# Altium PCB SCP_Controller.PcbDoc (part 1 of 2)
Units mm, origin at the board's own origin, x right, y up, seen from the top; angles counter-clockwise.
Board outline 53.34 x 68.58 mm, 2 copper layers (Top Layer, Bottom Layer); 54 components, 29 nets, 159 pads, 26 vias.
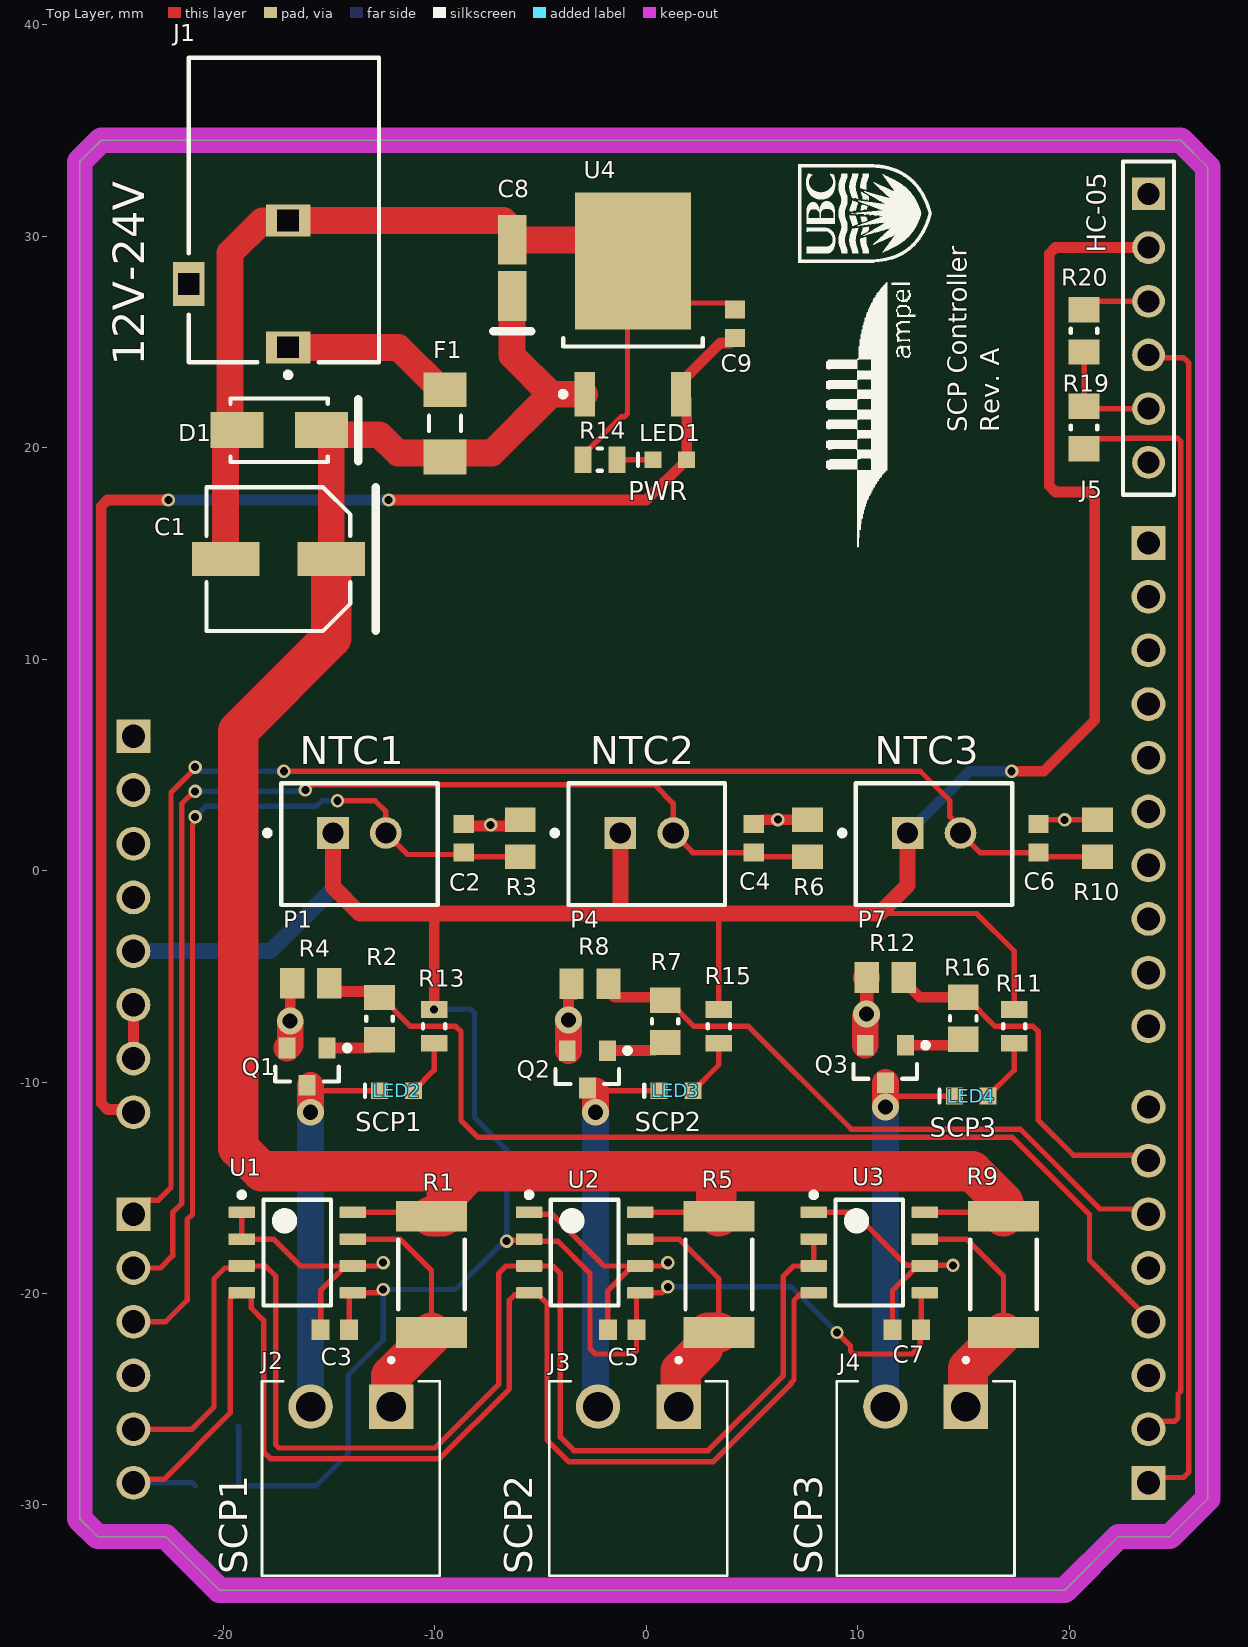
[diagram p0: Top Layer view]
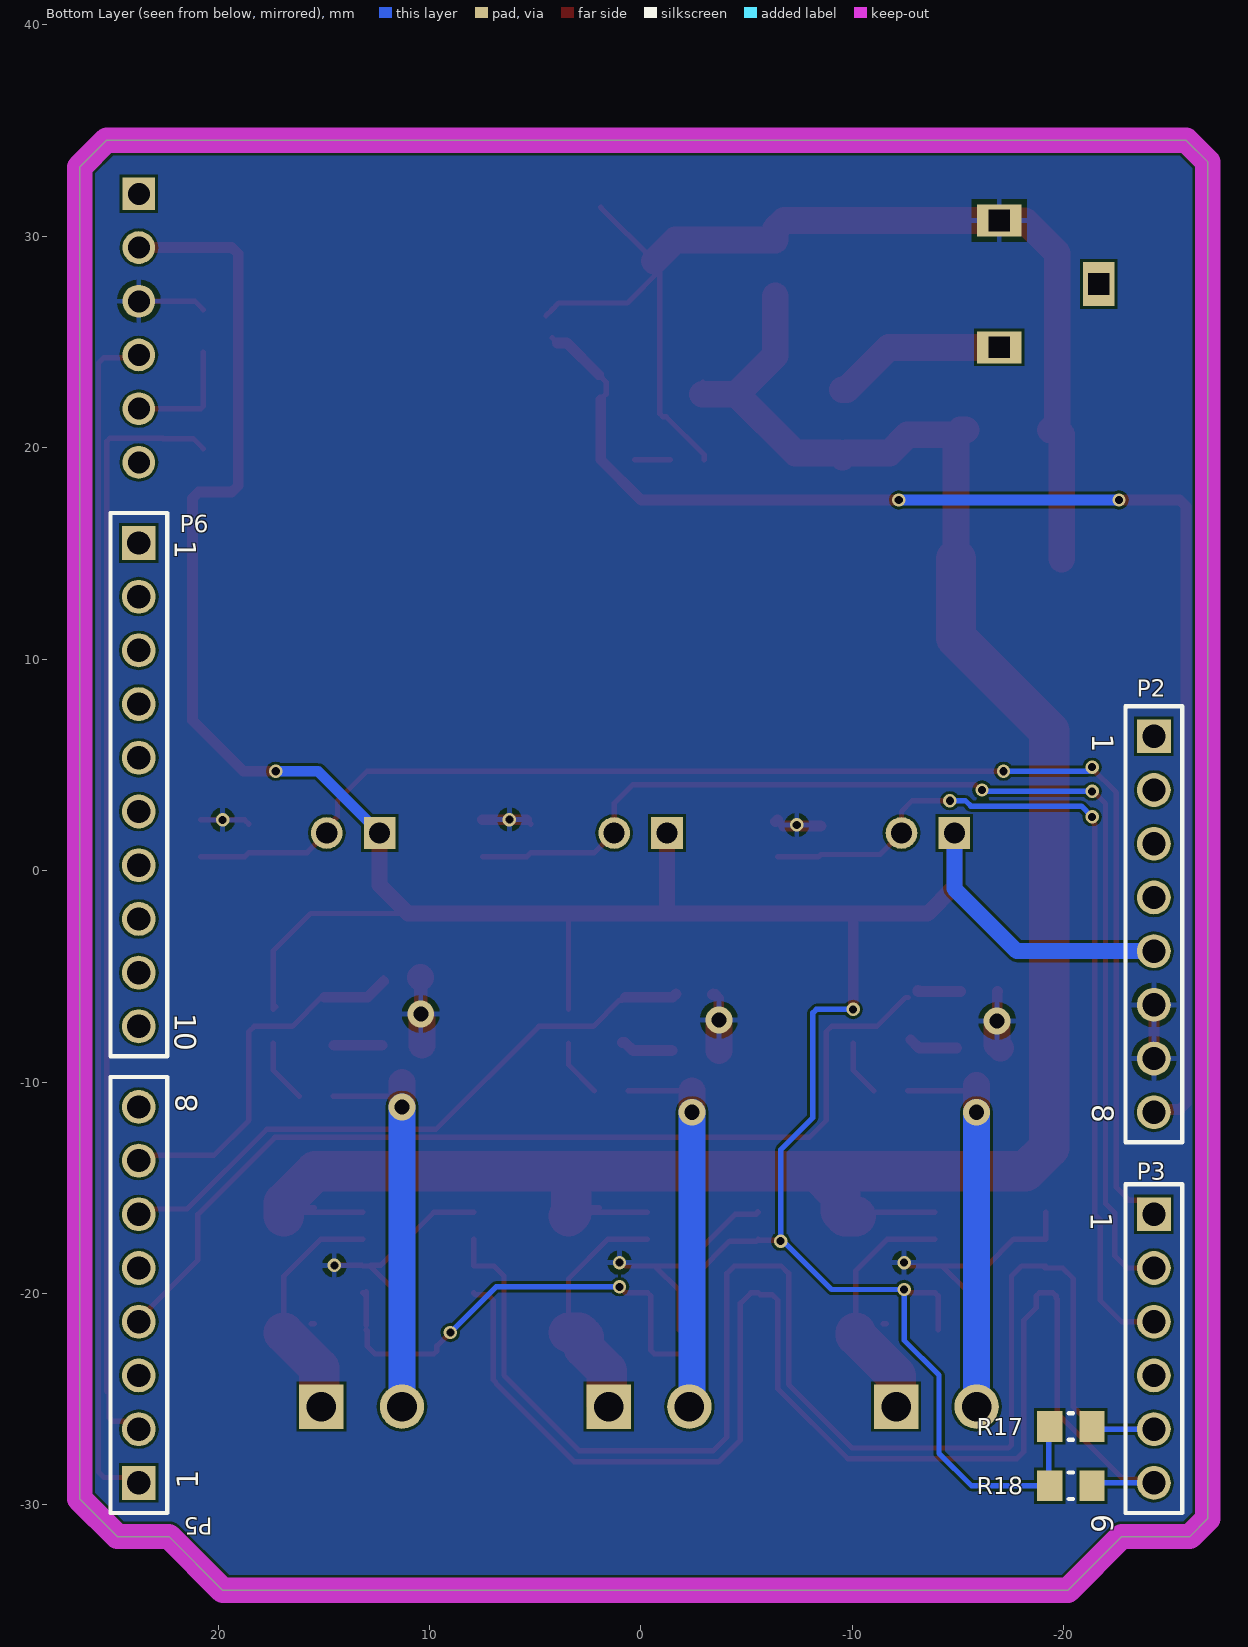
[diagram p1: Bottom Layer view, seen from below]
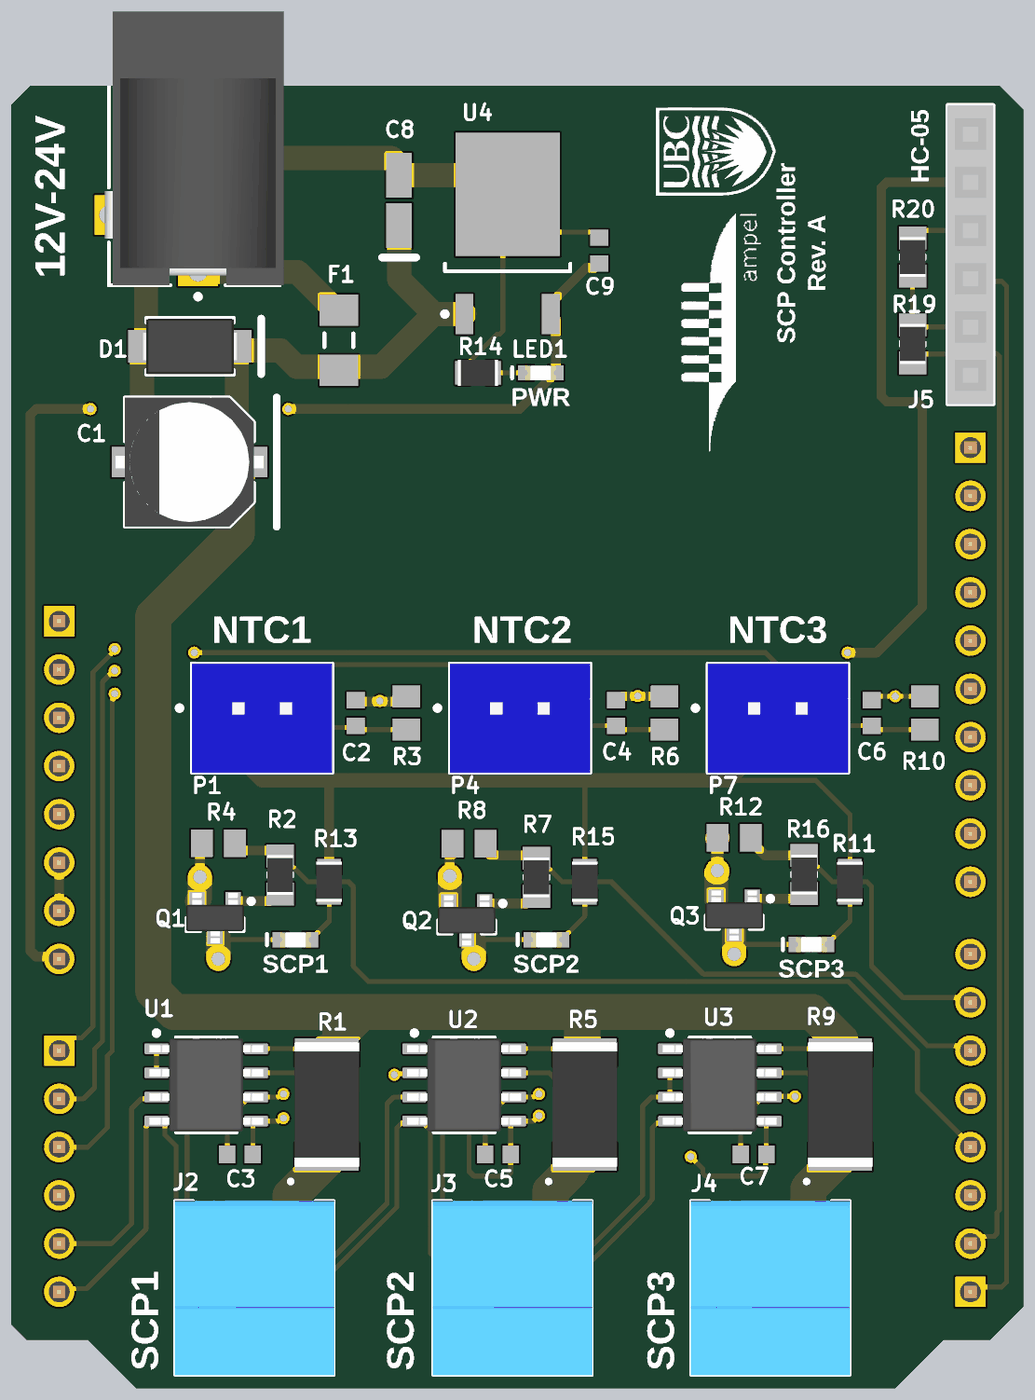
[diagram p2: 3D render of the assembled board from above, using the file's embedded part models]
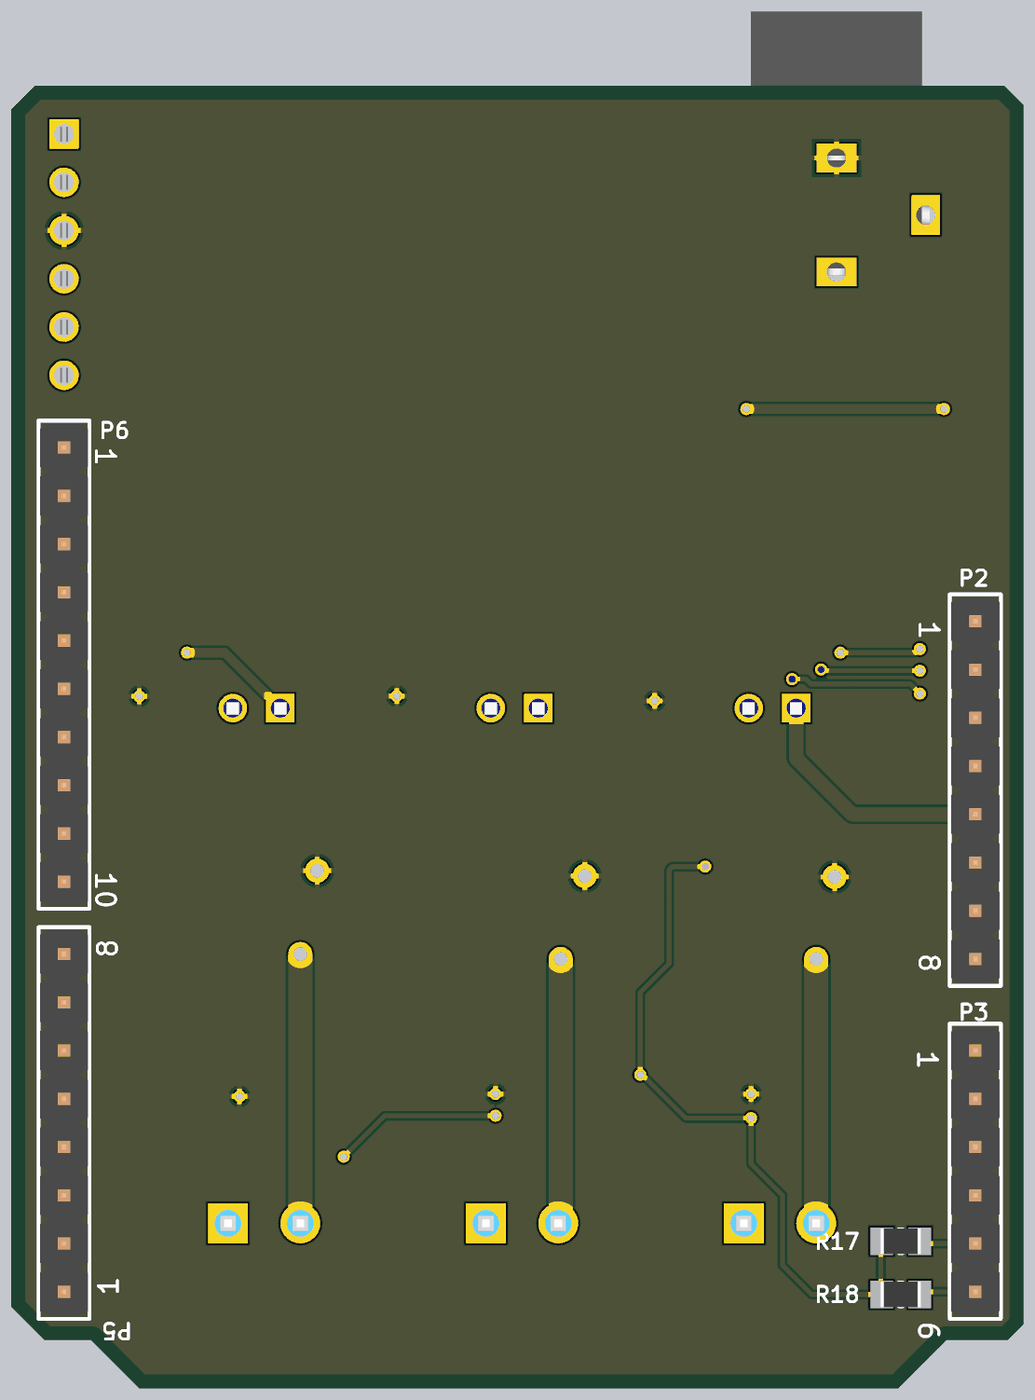
[diagram p3: 3D render of the assembled board from below, using the file's embedded part models]

## Layer stack, top to bottom
Top Solder: solder mask 0.0102, Solder Resist, Dk 3.5
Top Layer: signal copper 0.0356
Dielectric 1: dielectric 0.32, FR-4, Dk 4.8
Bottom Layer: signal copper 0.0356
Bottom Solder: solder mask 0.0102, Solder Resist, Dk 3.5

## Board outline
-26.797,33.528 -26.797,-30.658 -25.959,-31.496 -22.733,-31.496 -20.193,-34.036 19.787,-34.036 22.327,-31.496 24.765,-31.496 26.543,-29.718 26.543,33.274 25.273,34.544 -25.781,34.544

## Design rules (kind name [scope] priority, off if disabled: settings)
Clearance [All] p1: gap=0.127 ignorepadtopadclearanceinfootprint=FALSE
HoleSize [All] p1: absolutevalues=TRUE maxlimit=6.3 minlimit=0.2 maxpercent=80.000 minpercent=20.000
MinimumAnnularRing [All] p1: minimumring=0.076
MinimumSolderMaskSliver [All] p1: minsoldermaskwidth=0.127
PolygonConnect [All] p1: connectstyle=Relief reliefconductorwidth=0.254 reliefentries=4 polygonreliefangle="90 Angle" airgapwidth=0.254
RoutingVias [All] p1: holewidth=0.381 width=0.635 viastyle="Through Hole" minholewidth=0.3 minwidth=0.6 maxholewidth=0.711 maxwidth=1.27
SilkToSilkClearance [All] p1: silktosilkclearance=0.2
SolderMaskExpansion [All] p1: expansion=0.102 istentingtop=FALSE
Width [All] p1: maxlimit=2.54 minlimit=0.127 preferedwidth=0.254 minimp=50.000000 maximp=50.000000 favimp=50.000000
27 further rules are at their usual default settings.

## Components (designator, comment, footprint, x,y, rotation, side; value= is the part's Value field where it differs from the comment)
C1 "47uF 35V" PNSC-FP-V-D_V -17.399,14.732 r180 top
C2 "0.1uF" CAPC1608X90X35NL10T15 -8.636,1.524 r90 top
C3 "0.1uF" CAPC1608X90X35NL10T15 -14.732,-21.717 r180 top
C4 "0.1uF" CAPC1608X90X35NL10T15 5.08,1.524 r90 top
C5 "0.1uF" CAPC1608X90X35NL10T15 -1.143,-21.717 r180 top
C6 "0.1uF" CAPC1608X90X35NL10T15 18.542,1.524 r90 top
C7 "0.1uF" CAPC1608X90X35NL10T15 12.319,-21.717 r180 top
C8 "0.33uF 35V" KEMT-A-3216-18-2_M -6.35,28.503 r90 top
C9 "0.1uF" CAPC1608X90X35NL10T15 4.191,25.868 r90 top
D1 "B360A" DIOD-B360A_V -17.367,20.828 r0 top
F1 "6A" LFUS-0468001.NR_V -9.525,21.148 r270 top
J1 "24V 5A Max" CUI-PJ-102A_V -17.145,31.242 r0 top
J2 "SCP_1" *CUI_TBP02R1-381-02BE -12.065,-25.349 r180 top
J3 "SCP_1" *CUI_TBP02R1-381-02BE 1.524,-25.349 r180 top
J4 "SCP_1" *CUI_TBP02R1-381-02BE 15.113,-25.349 r180 top
J5 "HC-05" SMTC-SSW-106-02-X-S 23.749,32.004 r270 top
LED1 "GREEN" 0603_A 1.105,19.431 r0 top
LED2 "RED" 0603_A -11.811,-10.414 r0 top
LED3 "RED" 0603_A 1.397,-10.414 r0 top
LED4 "RED" 0603_A 15.367,-10.668 r0 top
P1 "NTC_1" JST-B2B-XH-A_V -13.57,1.778 r0 top
P2 "POWER" 61300811121 -24.257,-2.54 r270 bottom
P3 "ANALOG" 61300611121 -24.257,-22.606 r270 bottom
P4 "NTC_1" JST-B2B-XH-A_V 0.019,1.778 r0 top
P5 "DIGITAL_1" 61300811121 23.749,-20.066 r90 bottom
P6 "DIGITAL_2" 61301011121 23.749,4.064 r270 bottom
P7 "NTC_1" JST-B2B-XH-A_V 13.608,1.778 r0 top
Q1 "IRLML6244TRPBF" INTR-SOT23-3_V -16.047,-9.275 r270 top
Q2 "IRLML6244TRPBF" INTR-SOT23-3_V -2.791,-9.398 r270 top
Q3 "IRLML6244TRPBF" INTR-SOT23-3_V 11.303,-9.144 r270 top
R1 "0.1R" RESC6432X89X76LL25T25 -10.16,-19.094 r90 top
R2 "100R" RESC2013X60X35ML10T20 -12.621,-7.005 r270 top
R3 "18k 0.5%" RESC2013X70X40NL20T20 -5.969,1.524 r270 top
R4 "1M" RESC2013X70X40NL20T20 -15.875,-5.334 r0 top
R5 "0.1R" RESC6432X89X76LL25T25 3.429,-19.094 r90 top
R6 "18k 0.5%" RESC2013X70X40NL20T20 7.62,1.524 r270 top
R7 "100R" RESC2013X60X35ML10T20 0.889,-7.128 r270 top
R8 "1M" RESC2013X70X40NL20T20 -2.667,-5.359 r0 top
R9 "0.1R" RESC6432X89X76LL25T25 16.891,-19.094 r90 top
R10 "18k 0.5%" RESC2013X70X40NL20T20 21.336,1.524 r270 top
R11 "100R" RESC2013X60X35ML10T20 14.983,-6.985 r270 top
R12 "1M" RESC2013X70X40NL20T20 11.303,-5.055 r0 top
R13 "300R" RESC2013X60X35LL10T20 -10.033,-7.366 r270 top
R14 "270R" RESC2013X60X35LL10T20 -2.197,19.431 r0 top
R15 "300R" RESC2013X60X35LL10T20 3.429,-7.366 r270 top
R16 "300R" RESC2013X60X35LL10T20 17.399,-7.366 r270 top
R17 "3.3k" RESC2013X60X35ML10T20 -20.328,-26.289 r0 bottom
R18 "3.3k" RESC2013X60X35ML10T20 -20.328,-29.093 r0 bottom
R19 "1k" RESC2013X60X35ML10T20 20.701,20.955 r90 top
R20 "2k" RESC2013X60X35ML10T20 20.701,25.527 r270 top
U1 "INA219AIDR" D0008A_L -16.51,-18.062 r0 top
U2 "INA219AIDR" D0008A_L -2.921,-18.062 r0 top
U3 "INA219AIDR" D0008A_L 10.541,-18.062 r0 top
U4 "9V 0.5A" TO-252_N -0.635,26.779 r90 top

## Footprints (in the part's own frame and the unit in brackets; to place one, negate y for a bottom-side part, rotate by r counter-clockwise, add the part's x,y. Pads: shape width x height; smd on the part's side, far side on the other; paste and mask are expansions set on the pad)
0603_A [mm] "Chip LED, 2-Leads, Body 1.6x0.8mm, IPC Medium Density"
  rect 0.8x0.8 smd: 1(-0.8,0) 2(0.8,0)
  silkscreen extent -1.5,-0.3 -1.5,0.3, body extent -0.8,-0.4 0.8,0.4, height 0.7
61300611121 [mm] "Pin Header, pitch 2.54 mm, THT, Vertical, single row, 6p"
  rect 1.6x1.6 hole 1.1: 1(-6.35,0)
  round 1.6 hole 1.1: 2(-3.81,0) 3(-1.27,0) 4(1.27,0) 5(3.81,0) 6(6.35,0)
  silkscreen extent -7.77,-1.35 7.77,1.35, body extent -7.62,-1.27 7.62,1.27, height 8.57
61300811121 [mm] "Pin Header, pitch 2.54 mm, THT, Vertical, single row, 8p"
  rect 1.6x1.6 hole 1.1: 1(-8.89,0)
  round 1.6 hole 1.1: 2(-6.35,0) 3(-3.81,0) 4(-1.27,0) 5(1.27,0) 6(3.81,0) 7(6.35,0) 8(8.89,0)
  silkscreen extent -10.31,-1.35 10.31,1.35, body extent -10.16,-1.27 10.16,1.27, height 8.57
61301011121 [mm] "Pin Header, pitch 2.54 mm, THT, Vertical, single row, 10p"
  rect 1.6x1.6 hole 1.1: 1(-11.43,0)
  round 1.6 hole 1.1: 2(-8.89,0) 3(-6.35,0) 4(-3.81,0) 5(-1.27,0) 6(1.27,0) 7(3.81,0) 8(6.35,0) 9(8.89,0) 10(11.43,0)
  silkscreen extent -12.85,-1.35 12.85,1.35, body extent -12.7,-1.27 12.7,1.27, height 8.57
*CUI_TBP02R1-381-02BE [mm]
  rect 2.1x2.1 hole 1.4: 1(0,0)
  round 2.1 hole 1.4: 2(3.81,0)
  silkscreen extent -2.3,-2.3 6.11,8, body extent -2.3,-1.2 6.11,8, height 7.2
CAPC1608X90X35NL10T15 [mm] "Chip Capacitor, 2-Leads, Body 1.60x0.80mm, IPC Medium Density"
  rect 0.85x0.95 smd: 1(-0.675,0) 2(0.675,0)
  body extent -0.85,-0.45 0.85,0.45, height 0.9
CUI-PJ-102A_V [mm] "THD, 3-Leads, Body 14.4x9mm, Pitch 3mm"
  rect 2.1x1.5 hole 1 square: 1(0.2,-6.5) 2(0.2,-0.5)
  rect 1.5x2.1 hole 1 square: 3(-4.5,-3.5)
  silkscreen extent -4.5,-7.92 4.5,7.2, body extent -4.7,-7.2 4.7,7.2, height 11.5
D0008A_L [mm] "SOIC, 8-Leads, Body 5x4mm, Pitch 1.27mm, IPC High Density"
  rrect18% 1.25x0.55 smd: 1(-2.625,1.905) 2(-2.625,0.635) 3(-2.625,-0.635) 4(-2.625,-1.905) 5(2.625,-1.905) 6(2.625,-0.635) 7(2.625,0.635) 8(2.625,1.905)
  silkscreen extent -2.75,-2.5 1.6,2.85, body extent -3,-2.45 3,2.45, height 1.63
DIOD-B360A_V [mm] "Molded Diode, 2-Leads, Body 4.60x2.92mm"
  rect 2.5x1.7 smd: 1(-2,0) 2(2,0)
  silkscreen extent -2.3,-1.5 3.75,1.5, body extent -2.52,-1.46 2.52,1.46, height 2.3
INTR-SOT23-3_V [mm] "SOT23, 3-Leads, Body 3.04x1.4mm, Pitch 0.95mm"
  rect 0.972x0.802 smd: 1(-0.885,0.95) 2(-0.885,-0.95) 3(0.885,0)
  silkscreen extent -1.01,-1.5 0.7,2.03, body extent -1.32,-1.52 1.32,1.52, height 1.12
JST-B2B-XH-A_V [mm] "Header, 2-Leads, Body 7.4x5.75mm, Pitch 2.5mm"
  rect 1.5x1.5 hole 1: 1(-1.25,0)
  round 1.5 hole 1: 2(1.25,0)
  silkscreen extent -4.47,-3.4 3.7,2.35, body extent -3.7,-3.4 3.7,2.35, height 7
KEMT-A-3216-18-2_M [mm] "Molded TAN Capacitor, 2-Leads, Body 3.4x1.8mm, IPC Low Density"
  rect 2.35x1.35 smd: 1(-1.325,0) 2(1.325,0)
  silkscreen extent -3,-0.9 -3,0.9, body extent -1.7,-0.9 1.7,0.9, height 1.8
LFUS-0468001.NR_V [mm] "SMD, 2-Leads, Body 3.18x1.52mm"
  rect 1.65x2.03 smd: 1(-1.59,0) 2(1.59,0)
  silkscreen extent -0.37,-0.76 0.37,0.76, body extent -1.59,-0.76 1.59,0.76, height 0.58
PNSC-FP-V-D_V [mm] "CAPAE, 2-Leads, Body 6.80x6.80mm"
  rect 3.2x1.6 smd: 1(-2.5,0) 2(2.5,0)
  silkscreen extent -4.6,-3.4 3.4,3.4, body extent -3.9,-3.4 3.9,3.4, height 6.1
RESC2013X60X35LL10T20 [mm] "Chip Resistor, 2-Leads, Body 2.1x1.35mm, IPC High Density"
  rect 0.8x1.25 smd: 1(-0.8,0) 2(0.8,0)
  silkscreen extent -0.1,-0.53 0.1,0.53, body extent -1.05,-0.67 1.05,0.68, height 0.6
RESC2013X60X35ML10T20 [mm] "Chip Resistor, 2-Leads, Body 2.1x1.35mm, IPC Low Density"
  rect 1.2x1.45 smd: 1(-1,0) 2(1,0)
  silkscreen extent -0.1,-0.63 0.1,0.63, body extent -1.05,-0.68 1.05,0.67, height 0.6
RESC2013X70X40NL20T20 [mm] "Chip Resistor, 2-Leads, Body 2.00x1.25mm, IPC Medium Density"
  rect 1.15x1.45 smd: 1(-0.875,0) 2(0.875,0)
  body extent -1.1,-0.72 1.1,0.72, height 0.7
RESC6432X89X76LL25T25 [mm] "Chip Resistor, 2-Leads, Body 6.6x3.43mm, IPC High Density"
  rect 1.45x3.35 smd: 1(-2.75,0) 2(2.75,0)
  silkscreen extent -1.65,-1.58 1.65,1.58, body extent -3.3,-1.72 3.3,1.72, height 0.89
SMTC-SSW-106-02-X-S [mm] "SQ Post Socket, 1x6 Pins, Vertical, 2.54mm Pitch, Female"
  rect 1.55x1.55 hole 1.04: 1(0,0)
  round 1.55 hole 1.04: 2(2.54,0) 3(5.08,0) 4(7.62,0) 5(10.16,0) 6(12.7,0)
  silkscreen extent -1.53,-1.2 14.23,1.2, body extent -1.52,-1.21 14.22,1.21, height 8.51
TO-252_N [mm] "D-PAK, 4-Leads, Body 6.1x6.5mm, Pitch 2.28mm, Lead Span 9.7mm, IPC Medium Density"
  rect 2.1x0.95 smd: 1(-4.25,2.28) 3(-4.25,-2.28)
  rect 6.5x5.5 smd: 4(2.05,0)
  silkscreen extent -4.37,-3.3 -1.6,3.43, body extent -2,-3.3 4.2,3.3, height 2.4

## Part data
C1: library part CMP-2000-06216-1, "Aluminum Electrolytic Capacitor, 47 uF, +/- 20%, 35 V, 2-Pin SMD (Size Code D), -55 to 105 degC, RoHS, Tape and Reel", Capacitance=47uF, Case/Package=Radial, Manufacturer=Panasonic, Manufacturer Part Number=EEE-1VA470WP, Max Operating Temperature=85°C, Min Operating Temperature=-40°C, Package Quantity=1, Ripple Current=70mA, Supplier Part Number 1=PCE3961CT-ND, Tolerance=20%, Voltage Rating=35V, Category="Aluminum Electrolytic Capacitors", ComponentLink1Description=https://datasheet.ciiva.com/2983/aba0000ce2-2983927.pdf?src-supplier=Avnet, ComponentLink1URL=https://datasheet.ciiva.com/2983/aba0000ce2-2983927.pdf?src-supplier=Avnet, ComponentLink2Description=https://datasheet.ciiva.com/14598/70255710-14598937.pdf?src-supplier=Allied+Electronics, ComponentLink2URL=https://datasheet.ciiva.com/14598/70255710-14598937.pdf?src-supplier=Allied+Electronics, ComponentLink3Description=https://datasheet.ciiva.com/15165/getdatasheetpartid-86239-15165868.pdf?src-supplier=Verical, ComponentLink3URL=https://datasheet.ciiva.com/15165/getdatasheetpartid-86239-15165868.pdf?src-supplier=Verical, ComponentLink4Description=https://datasheet.ciiva.com/16507/aba0000ce2-16507965.pdf?src-supplier=Future+Electronics, ComponentLink4URL=https://datasheet.ciiva.com/16507/aba0000ce2-16507965.pdf?src-supplier=Future+Electronics, ComponentLink5Description=https://datasheet.ciiva.com/30206/11aba0000ce2-30206253.pdf?src-supplier=Onlinecomponents.com, ComponentLink5URL=https://datasheet.ciiva.com/30206/11aba0000ce2-30206253.pdf?src-supplier=Onlinecomponents.com, Contact Plating=Tin, Diameter=6.3mm, Height=5.4mm, Height - Seated (Max)=0.213inch, Lead Free="Lead Free", Length=5.5mm, Life (Hours)=1000Hour, Mount="Surface Mount,PCB", Packaging="Tape and Reel", Pricing 1="1=0.41000, 10=0.28400, 100=0.17040, 500=0.12782 (USD)", Radiation Hardening=No, REACH SVHC=Unknown, Ripple Current (AC)=70mA, RoHS=Yes, Stock 1=380414, Supplier 1=Digi-Key, Termination=SMD/SMT, Voltage Rating (DC)=35V
C2 C3 C4 C5 C6 C7 C9: library part CMP-2006-02353-1, Capacitance=100nF, Case Code (Imperial)=0603, Case Code (Metric)=1608, Manufacturer=Murata, Manufacturer Part Number=GCJ188R71E104KA12D, Max Operating Temperature=125°C, Min Operating Temperature=-55°C, Ratings=AEC-Q200, Supplier Part Number 1=490-16477-1-ND, Tolerance=10%, Voltage Rating=25V, Case/Package=0603, Category="Ceramic Capacitors", ComponentLink1Description=http://search.murata.co.jp/Ceramy/image/img/A01X/G101/ENG/GCJ188R71E104KA12-01.pdf?src-supplier=Digi-Key, ComponentLink1URL=http://search.murata.co.jp/Ceramy/image/img/A01X/G101/ENG/GCJ188R71E104KA12-01.pdf?src-supplier=Digi-Key, Features="Soft Termination", Mount="Surface Mount", Packaging="Tape and Reel", Pricing 1="1=0.20000, 10=0.13300, 100=0.06740, 500=0.04610, 1000=0.04079 (USD)", RoHS=No, Stock 1=9578, Supplier 1=Digi-Key
C8: library part CMP-2000-05172-1, Capacitance=330nF, Case Code (Imperial)=1206, Case Code (Metric)=3216, Dielectric Material=Tantalum, ESR (Equivalent Series Resistance)=15R, Leakage Current=500nA, Manufacturer=KEMET, Manufacturer Part Number=T491A334K035AT, Max Operating Temperature=125°C, Min Operating Temperature=-55°C, Package Quantity=1, Supplier Part Number 1=399-3693-1-ND, Tolerance=10%, Voltage=35V, Case/Package=1206, Category="Tantalum Capacitors", ComponentLink10Description=https://datasheet.ciiva.com/14589/70095774-14589356.pdf?src-supplier=Allied+Electronics, ComponentLink10URL=https://datasheet.ciiva.com/14589/70095774-14589356.pdf?src-supplier=Allied+Electronics, ComponentLink11Description=https://datasheet.ciiva.com/257/kem-t2005-t491-257549.pdf?src-supplier=Digi-Key, ComponentLink11URL=https://datasheet.ciiva.com/257/kem-t2005-t491-257549.pdf?src-supplier=Digi-Key, ComponentLink1Description=https://datasheet.ciiva.com/34302/1573370-34302509.pdf?src-supplier=Jameco, ComponentLink1URL=https://datasheet.ciiva.com/34302/1573370-34302509.pdf?src-supplier=Jameco, ComponentLink2Description=https://datasheet.ciiva.com/7758/1446014-7758887.pdf?src-supplier=Element14, ComponentLink2URL=https://datasheet.ciiva.com/7758/1446014-7758887.pdf?src-supplier=Element14, ComponentLink3Description=https://datasheet.ciiva.com/7758/1698764-7758889.pdf?src-supplier=Element14, ComponentLink3URL=https://datasheet.ciiva.com/7758/1698764-7758889.pdf?src-supplier=Element14, ComponentLink4Description=https://datasheet.ciiva.com/257/kem-t2005-t491-257550.pdf?src-supplier=Digi-Key, ComponentLink4URL=https://datasheet.ciiva.com/257/kem-t2005-t491-257550.pdf?src-supplier=Digi-Key, ComponentLink5Description=https://datasheet.ciiva.com/7758/1446014-7758888.pdf?src-supplier=Element14, ComponentLink5URL=https://datasheet.ciiva.com/7758/1446014-7758888.pdf?src-supplier=Element14, ComponentLink6Description=https://datasheet.ciiva.com/7758/1446014-7758890.pdf?src-supplier=Element14, ComponentLink6URL=https://datasheet.ciiva.com/7758/1446014-7758890.pdf?src-supplier=Element14, ComponentLink7Description=https://datasheet.ciiva.com/5933/1446014-5933354.pdf?src-supplier=Farnell, ComponentLink7URL=https://datasheet.ciiva.com/5933/1446014-5933354.pdf?src-supplier=Farnell, ComponentLink8Description=https://datasheet.ciiva.com/14595/70095774-14595094.pdf?src-supplier=Allied+Electronics, ComponentLink8URL=https://datasheet.ciiva.com/14595/70095774-14595094.pdf?src-supplier=Allied+Electronics, ComponentLink9Description=https://datasheet.ciiva.com/257/kem-t2005-t491-257548.pdf?src-supplier=Digi-Key, ComponentLink9URL=https://datasheet.ciiva.com/257/kem-t2005-t491-257548.pdf?src-supplier=Digi-Key, Depth=1.6mm, Dissipation Factor=4%, Features="General Purpose", Height=1.6mm, Height - Seated (Max)=0.071inch, Lead Free="Lead Free", Lead Pitch=1.2mm, Length=3.2mm, Life (Hours)=2000Hour, Mount="Surface Mount,PCB", Number of Pins=2, Packaging="Tape and Reel", Polarity=Polar, Pricing 1="1=0.45000, 10=0.31300, 100=0.18770, 500=0.14076, 1000=0.11886 (USD)", Radiation Hardening=No, REACH SVHC="No SVHC", RoHS=Yes, Stock 1=42469, Supplier 1=Digi-Key, Termination=SMD/SMT, Voltage Rating=35V, Voltage Rating (DC)=35V, Width=1.6mm
D1: library part CMP-2000-05898-1, "Schottky Barrier Rectifier, 3 A, -55 to 150 degC, 2-Pin Molded, RoHS, Tape and Reel", Average Rectified Current=3A, Capacitance=250pF, Case/Package=SMA, Forward Voltage=700mV, Ifsm - Forward Surge Current=80A, Ir - Reverse Current=500uA, Manufacturer=DiodesIncorporated, Manufacturer Part Number=B360A-13-F, Max Operating Temperature=150°C, Max Repetitive Reverse Voltage (Vrrm)=60V, Maximum Operating Temperature=+125C, Min Operating Temperature=-55°C, Minimum Operating Temperature=-55C, Operating Temperature Range=-55Cto+125C, Package Description="2-Pin Surface Mount Device, Body 4.3 x 2.605 mm", Package Quantity=5000, Supplier Part Number 1=B360A-FDIDKR-ND, Vf - Forward Voltage=0.7V, Brand=DiodesIncorporated, Category="Schottky Diodes", ComponentLink10Description=https://datasheet.ciiva.com/16199/ds13005-16199422.pdf?src-supplier=Future+Electronics, ComponentLink10URL=https://datasheet.ciiva.com/16199/ds13005-16199422.pdf?src-supplier=Future+Electronics, ComponentLink1Description=https://datasheet.ciiva.com/914/ds30891-914080.pdf?src-supplier=Digi-Key, ComponentLink1URL=https://datasheet.ciiva.com/914/ds30891-914080.pdf?src-supplier=Digi-Key, ComponentLink2Description=https://datasheet.ciiva.com/4244/861ds30891-4244631.pdf?src-supplier=Arrow, ComponentLink2URL=https://datasheet.ciiva.com/4244/861ds30891-4244631.pdf?src-supplier=Arrow, ComponentLink3Description=https://datasheet.ciiva.com/34302/1538902-34302361.pdf?src-supplier=Jameco, ComponentLink3URL=https://datasheet.ciiva.com/34302/1538902-34302361.pdf?src-supplier=Jameco, ComponentLink4Description=https://datasheet.ciiva.com/26788/b360a-13-f-26788524.pdf?src-supplier=IIIC, ComponentLink4URL=https://datasheet.ciiva.com/26788/b360a-13-f-26788524.pdf?src-supplier=IIIC, ComponentLink5Description=https://datasheet.ciiva.com/914/ds30891-914081.pdf?src-supplier=Digi-Key, ComponentLink5URL=https://datasheet.ciiva.com/914/ds30891-914081.pdf?src-supplier=Digi-Key, ComponentLink6Description=https://datasheet.ciiva.com/1177/ds30891-1177482.pdf?src-supplier=Element14, ComponentLink6URL=https://datasheet.ciiva.com/1177/ds30891-1177482.pdf?src-supplier=Element14, ComponentLink7Description=https://datasheet.ciiva.com/914/ds30891-914082.pdf?src-supplier=Digi-Key, ComponentLink7URL=https://datasheet.ciiva.com/914/ds30891-914082.pdf?src-supplier=Digi-Key, ComponentLink8Description=https://datasheet.ciiva.com/25919/ds30891-25919703.pdf?src-supplier=Avnet+Europe, ComponentLink8URL=https://datasheet.ciiva.com/25919/ds30891-25919703.pdf?src-supplier=Avnet+Europe, ComponentLink9Description=https://datasheet.ciiva.com/22695/1911813-22695787.pdf?src-supplier=Element14, ComponentLink9URL=https://datasheet.ciiva.com/22695/1911813-22695787.pdf?src-supplier=Element14, Configuration=Single, Contact Plating=Tin,Matte, Current Rating=3A, Datasheet URL=https://datasheet.ciiva.com/914/ds30891-914080.pdf, Datasheet Version="Rev. 15-2, 09/2014", Element Configuration=Single, Factory Pack Quantity=5000, Forward Current=3A, Height=2.3mm, If - Forward Current=3A, Lead Free="Lead Free", Length=4.6mm, Manufacturer URL=http://www.diodes.com/, Max Forward Surge Current (Ifsm)=80A, Max Reverse Voltage (DC)=60V, Mount="Surface Mount", Mounting Style=SMD/SMT, Mounting Technology=SurfaceMount, Number of Pins=2, Output Current=3A, Package / Case=SMA, Package Reference=B360A, Packaging=Reel, Peak Non-Repetitive Surge Current=80A, Peak Reverse Current=500uA, Polarity=Standard, Pricing 1="1=0.38000, 10=0.30800, 100=0.17690, 500=0.16380, 1000=0.11138 (USD)", Product=SchottkyDiodes, Product Category=SchottkyDiodes&Rectifiers, Radiation Hardening=No, REACH SVHC="No SVHC", RoHS=True, Series=B360, Stock 1=514772, Supplier 1=Digi-Key, Technology=Si, Termination=SMD/SMT, Termination Style=SMD/SMT, Type=SchottkyBarrierRectifier, Unit Weight=0.002258oz, Voltage Rating (DC)=60V, Vrrm - Repetitive Reverse Voltage=60V, Weight=0.002258oz, Width=2.92mm
F1: library part CMP-2000-05753-1, Case Code (Imperial)=1206, Case Code (Metric)=3216, DC Cold Resistance=15mR, Manufacturer="Bel TRP", Manufacturer Part Number=C1F6, Max Operating Temperature=125°C, Max Voltage Rating (DC)=63V, Min Operating Temperature=-55°C, Supplier Part Number 1=507-1887-1-ND, Voltage Rating=125V, Approvals=CE,cURus, Case/Package=1206, Category=Fuses, ComponentLink1Description=http://www.farnell.com/datasheets/2571625.pdf?src-supplier=Farnell, ComponentLink1URL=http://www.farnell.com/datasheets/2571625.pdf?src-supplier=Farnell, ComponentLink2Description=http://www.mouser.com/ds/2/643/C1F-594910.pdf?src-supplier=Mouser, ComponentLink2URL=http://www.mouser.com/ds/2/643/C1F-594910.pdf?src-supplier=Mouser, ComponentLink3Description=http://belfuse.com/pdfs/C1F.pdf?src-supplier=Avnet+Asia, ComponentLink3URL=http://belfuse.com/pdfs/C1F.pdf?src-supplier=Avnet+Asia, ComponentLink4Description=http://belfuse.com/pdfs/C1F.pdf?src-supplier=Avnet, ComponentLink4URL=http://belfuse.com/pdfs/C1F.pdf?src-supplier=Avnet, ComponentLink5Description=https://belfuse.com/resources/datasheets/circuitprotection/ds-cp-c1f-series.pdf?src-supplier=Digi-Key, ComponentLink5URL=https://belfuse.com/resources/datasheets/circuitprotection/ds-cp-c1f-series.pdf?src-supplier=Digi-Key, Contact Plating=Tin, Current Rating=6A, Fuse Type="Board Mount (Cartridge Style Excluded)", Length=0.126inch, Mount="Surface Mount", Number of Pins=2, Packaging="Tape and Reel", Pricing 1="1=0.29000, 5=0.27800, 10=0.26500, 50=0.23660, 100=0.22030, 250=0.19584, 500=0.16320, 1000=0.15504 (USD)", RoHS=Yes, Stock 1=11906, Supplier 1=Digi-Key, Voltage Rating (AC)=125V, Voltage Rating (DC)=63V, Width=0.062inch
J1: library part CMP-2000-06899-1, "DC Power Jack, 5 A, -25 to 85 degC, 3-Pin THD, RoHS", Color=Black, Current Rating=5A, Flammability Rating="UL94 V-0", Insulation Resistance=50MR, Manufacturer=CUI, Manufacturer Part Number=PJ-102AH, Max Operating Temperature=85°C, Min Operating Temperature=-25°C, Package Quantity=280, Supplier Part Number 1=CP-102AH-ND, Voltage Rating=24V, Category=Connectors, ComponentLink1Description=http://www.mouser.com/ds/2/670/PJ-102AH-524179.pdf?src-supplier=Mouser, ComponentLink1URL=http://www.mouser.com/ds/2/670/PJ-102AH-524179.pdf?src-supplier=Mouser, ComponentLink2Description=http://www.cui.com/Product/Resource/FuturePDF/PJ-102AH.pdf?src-supplier=Future+Electronics, ComponentLink2URL=http://www.cui.com/Product/Resource/FuturePDF/PJ-102AH.pdf?src-supplier=Future+Electronics, ComponentLink3Description=https://www.cui.com/product/resource/digikeypdf/pj-102ah.pdf?src-supplier=Digi-Key, ComponentLink3URL=https://www.cui.com/product/resource/digikeypdf/pj-102ah.pdf?src-supplier=Digi-Key, Connector Type=Jack, Contact Gender=Male, Contact Material=Copper, Contact Plating=Nickel, Diameter=2.1mm, Gender=Male, Housing Color=Black, Housing Material=Thermoplastic, Lead Free="Lead Free", Mount="Through Hole", Number of Conductors=2, Orientation=Horizontal, Packaging=Bulk, Pricing 1="1=0.76000, 10=0.70800, 25=0.63720, 50=0.56640, 100=0.54280, 250=0.49560, 500=0.47200, 1000=0.38940, 2500=0.35400 (USD)", RoHS=Yes, Shielding=Unshielded, Stock 1=92806, Supplier 1=Digi-Key, Termination="Through Hole"
J2 J3 J4: library part TBP02R1-381-02BE, Manufacturer=CUI, Supplier Part Number 1=102-6480-ND, Manufacturer Part Number=TBP02R1-381-02BE, Pricing 1="1=0.47000, 10=0.24600, 25=0.17440, 50=0.14820, 100=0.14300, 250=0.12092, 500=0.11180, 1000=0.09880, 5000=0.07540 (USD)", RoHS=No, Stock 1=924, Supplier 1=Digi-Key
J5: library part CMP-1023-00360-1, "SQ Post Socket, Through-hole, Vertical, -55 to 105 degC, 2.54mm Pitch, 6-Pin, Female, RoHS", Color=Black, Manufacturer=Samtec, Manufacturer Part Number=PPPC061LFBN-RC, Package Quantity=1000, PartNumber=SSW-106-02-T-S, Supplier Part Number 1=S7039-ND, Temperature Range="-55 to 105 degC", Category=Connectors, ComponentLink1Description="Manufacturer URL", ComponentLink1URL=http://www.samtec.com, ComponentLink2Description=Datasheet, ComponentLink2URL=http://www.samtec.com/documents/webfiles/pdf/SSW_TH.PDF, ComponentLink3Description="Package Specification", ComponentLink3URL=http://www.samtec.com/documents/webfiles/cpdf/SSW-1XX-XX-XXX-X-XX-XXX-XX-MKT.pdf, ComponentLink4Description=https://media.digikey.com/pdf/Data%20Sheets/Sullins%20PDFs/Female_Headers.100_DS.pdf?src-supplier=Digi-Key, ComponentLink4URL=https://media.digikey.com/pdf/Data%20Sheets/Sullins%20PDFs/Female_Headers.100_DS.pdf?src-supplier=Digi-Key, Connector Type=Header,Socket, Contact Material=Bronze, Contact Plating=Gold, DatasheetVersion=F-214, Height=8.5mm, Housing Material=Plastic, Lead Free="Lead Free", Length=15.7mm, Mount="Through Hole", Mounting Technology=Through-hole, Number of Positions=6, Number of Rows=1, Orientation=Vertical, PackageDescription="Assembly, Socket Strip .016 X .031 Tail", PackageReference=SSW-106-02-X-S, PackageVersion="CA, 6/1987", Packaging=Bulk, Pitch="2.54 mm", Pricing 1="1=0.53000, 10=0.50000, 100=0.38300, 500=0.33300, 1000=0.27473, 5000=0.24143, 10000=0.24050 (USD)", RoHS=True, Stock 1=24151, Supplier 1=Digi-Key, Termination=Solder, Width=2.5mm
LED1: library part CMP-1426-00006-1, "SMD mono-color Chip LED, WL-SMCW, Bright Green", Case Code (Imperial)=0603, Case Code (Metric)=1608, Color="Bright Green", Forward Current=30mA, Forward Voltage=2V, Manufacturer="Wuerth Elektronik", Manufacturer Part Number=150060VS75000, Max Operating Temperature=85°C, Min Operating Temperature=-40°C, Package Quantity=1, Supplier Part Number 1=732-4980-1-ND, Test Current=20mA, Case/Package=0603, Category=LEDs, ComponentLink1Description="Manufacturer URL", ComponentLink1URL=http://www.we-online.com, ComponentLink2Description=Datasheet, ComponentLink2URL=http://katalog.we-online.com/led/datasheet/150060VS75000.pdf, ComponentLink3Description=https://datasheet.ciiva.com/23843/150060vs75000-23843249.pdf?src-supplier=Newark, ComponentLink3URL=https://datasheet.ciiva.com/23843/150060vs75000-23843249.pdf?src-supplier=Newark, ComponentLink4Description=https://datasheet.ciiva.com/29279/759431-da-01-en-chipled-0603-w-kl-h-gruen-150060vs7500-29279199.pdf?src-supplier=Conrad, ComponentLink4URL=https://datasheet.ciiva.com/29279/759431-da-01-en-chipled-0603-w-kl-h-gruen-150060vs7500-29279199.pdf?src-supplier=Conrad, ComponentLink5Description=https://datasheet.ciiva.com/29562/150060vs75000-29562919.pdf?src-supplier=Digi-Key, ComponentLink5URL=https://datasheet.ciiva.com/29562/150060vs75000-29562919.pdf?src-supplier=Digi-Key, ComponentLink6Description=https://datasheet.ciiva.com/29562/150060vs75000-29562920.pdf?src-supplier=Digi-Key, ComponentLink6URL=https://datasheet.ciiva.com/29562/150060vs75000-29562920.pdf?src-supplier=Digi-Key, ComponentLink7Description=https://datasheet.ciiva.com/29562/150060vs75000-29562921.pdf?src-supplier=Digi-Key, ComponentLink7URL=https://datasheet.ciiva.com/29562/150060vs75000-29562921.pdf?src-supplier=Digi-Key, ComponentLink8Description=https://datasheet.ciiva.com/48430/150060vs75000-eng-tds-48430043.pdf?src-supplier=Distrelec, ComponentLink8URL=https://datasheet.ciiva.com/48430/150060vs75000-eng-tds-48430043.pdf?src-supplier=Distrelec, Dominant Wavelength=570nm, Height=0.7mm, Length=1.6mm, Lens Style=Clear,Rectangular, Luminous Intensity=40mcd, Mount="Surface Mount", Number of Pins=2, PackageReference=0603_A, Packaging="Tape and Reel", PartNumber=150060VS75000, Pricing 1="1=0.14000, 50=0.13300, 100=0.11400, 500=0.09900 (USD)", REACH SVHC=Unknown, RoHS=Yes, Stock 1=59962, Supplier 1=Digi-Key, Viewing Angle=140°, Wavelength=570nm, Width=0.8mm
LED2 LED3 LED4: library part CMP-1426-00001-1, "SMD mono-color Chip LED, WL-SMCW, Red", Case Code (Imperial)=0603, Case Code (Metric)=1608, Color=Red, Forward Current=30mA, Forward Voltage=2V, Manufacturer="Wuerth Elektronik", Manufacturer Part Number=150060RS75000, Max Operating Temperature=85°C, Min Operating Temperature=-40°C, Package Quantity=1, Supplier Part Number 1=732-4978-1-ND, Test Current=20mA, Case/Package=0603, Category=LEDs, ComponentLink1Description="Manufacturer URL", ComponentLink1URL=http://www.we-online.com, ComponentLink2Description=Datasheet, ComponentLink2URL=http://katalog.we-online.com/led/datasheet/150060RS75000.pdf, ComponentLink3Description=https://datasheet.ciiva.com/29563/150060rs75000-29563040.pdf?src-supplier=Digi-Key, ComponentLink3URL=https://datasheet.ciiva.com/29563/150060rs75000-29563040.pdf?src-supplier=Digi-Key, ComponentLink4Description=https://datasheet.ciiva.com/29279/759428-da-01-en-chipled-0603-w-kl-rot-150060rs75000-29279196.pdf?src-supplier=Conrad, ComponentLink4URL=https://datasheet.ciiva.com/29279/759428-da-01-en-chipled-0603-w-kl-rot-150060rs75000-29279196.pdf?src-supplier=Conrad, Dominant Wavelength=625nm, Height=0.7mm, Length=1.6mm, Lens Style=Clear,Rectangular, Luminous Intensity=250mcd, Mount="Surface Mount", PackageReference=0603_A, Packaging="Cut Tape", PartNumber=150060RS75000, Pricing 1="1=0.14000, 50=0.13300, 100=0.11400, 500=0.09900 (USD)", REACH SVHC=Unknown, RoHS=Yes, Stock 1=19848, Supplier 1=Digi-Key, Viewing Angle=140°, Wavelength=625nm, Width=0.8mm
P1 P4 P7: library part CMP-2000-05888-1, "Male Header, Pitch 2.5 mm, 1 x 2 Position, Height 7 mm, Tail Length 3.4 mm, -25 to 85 degC, RoHS, Bulk", Manufacturer=JST, Package Description="Male Header, Pitch 2.5 mm, 1 x 2 Position, Height 7 mm, Tail Length 3.4 mm", Package Reference=B2B-XH-A, Supplier Part Number 1=455-2247-ND, Datasheet URL=http://www.jst-mfg.com/product/pdf/eng/eXH.pdf, Datasheet Version=05/2016, Manufacturer URL=http://www.jst.com/home2.html, Mounting Technology=ThroughHole, No of Positions=2, Pitch=2.5mm, Style/Orientation=StraightHeader/Plug, Supplier 1=Digi-Key, Termination=Crimp, Type=ShroudedHeader
P2 P5: library part CMP-1502-01076-1, "THT Vertical Pin Header WR-PHD, Pitch 2.54 mm, Single Row, 8 pins", Contact Resistance=20mOhm, Manufacturer="Wurth Elektronik", Operating Temperature=-40to105degC, Package Reference=61300811121, Rated Current=3A, Supplier Part Number 1=732-5321-ND, Withstanding Voltage=500VAC, Working Voltage=250VAC, Datasheet URL=https://katalog.we-online.de/em/datasheet/6130xx11121.pdf, Gender=Male, Manufacturer URL=http://www.we-online.de, Mounting Technology=THT, Orientation=Vertical, Packaging=Bag, Part Number=61300811121, Pin Number=8, Pitch=2.54mm, Publisher=WurthElektronik, Row Number=Single, Supplier 1=Digi-Key
P3: library part CMP-1502-01070-1, "THT Vertical Pin Header WR-PHD, Pitch 2.54 mm, Single Row, 6 pins", Contact Resistance=20mOhm, Manufacturer="Wurth Elektronik", Operating Temperature=-40to105degC, Package Reference=61300611121, Rated Current=3A, Supplier Part Number 1=732-5319-ND, Withstanding Voltage=500VAC, Working Voltage=250VAC, Datasheet URL=https://katalog.we-online.de/em/datasheet/6130xx11121.pdf, Gender=Male, Manufacturer URL=http://www.we-online.de, Mounting Technology=THT, Orientation=Vertical, Packaging=Bag, Part Number=61300611121, Pin Number=6, Pitch=2.54mm, Publisher=WurthElektronik, Row Number=Single, Supplier 1=Digi-Key
P6: library part CMP-1502-01082-1, "THT Vertical Pin Header WR-PHD, Pitch 2.54 mm, Single Row, 10 pins", Contact Resistance=20mOhm, Manufacturer="Wurth Elektronik", Operating Temperature=-40to105degC, Package Reference=61301011121, Rated Current=3A, Supplier Part Number 1=732-2670-ND, Withstanding Voltage=500VAC, Working Voltage=250VAC, Datasheet URL=https://katalog.we-online.de/em/datasheet/6130xx11121.pdf, Gender=Male, Manufacturer URL=http://www.we-online.de, Mounting Technology=THT, Orientation=Vertical, Packaging=Bag, Part Number=61301011121, Pin Number=10, Pitch=2.54mm, Publisher=WurthElektronik, Row Number=Single, Supplier 1=Digi-Key
Q1 Q2 Q3: library part CMP-2000-06486-1, "HEXFET(R) Power MOSFET / , 20 V, -55 to 150 degC, 3-Pin SOT-23, RoHS, Tape and Reel", Manufacturer="International Rectifier", Maximum Continuous Drain Current=6.3A, Maximum Drain Source Resistance=0.027Ω, Maximum Drain Source Voltage=20V, Maximum Gate Source Voltage=±12V, Maximum Gate Threshold Voltage=1.1V, Maximum Operating Temperature=+150°C, Maximum Power Dissipation=1.3W, Minimum Gate Threshold Voltage=0.5V, Minimum Operating Temperature=-55°C, Package Description="3-Pin Small Outline Transistor, Body 2.92 x 1.3 mm, Pitch 0.95 mm", Package Reference=SOT-23, Supplier Part Number 1=IRLML6244TRPBFCT-ND, Typical Input Capacitance @ Vds=700pF@16V, Category=PowerMOSFET, Channel Mode=Enhancement, Channel Type=N, Datasheet URL=http://www.irf.com/product-info/datasheets/data/irlml6244pbf.pdf, Datasheet Version=03/2012, Dimensions=3.04x1.4x1.02mm, Height=1.02mm, Length=3.04mm, Manufacturer URL=http://internationalrectifier.com/, Mounting Technology=SurfaceMount, Mounting Type=SurfaceMount, Number of Elements per Chip=1, Package Type=SOT-23, Pin Count=3, Supplier 1=Digi-Key, Transistor Configuration=Single, Transistor Material=Si, Typical Gate Charge @ Vgs=8.9nC@4.5V, Typical Turn-Off Delay Time=19ns, Typical Turn-On Delay Time=4.9ns, Width=1.4mm
R1 R5 R9: library part CMP-2000-07420-1, "RES 0.1 OHM 1% 1W 2512", Case Code (Imperial)=2512, Case Code (Metric)=6432, Manufacturer=Yageo, Manufacturer Part Number=RL2512FK-070R1L, Max Operating Temperature=155°C, Max Power Dissipation=1W, Min Operating Temperature=-55°C, Package Quantity=4000, Resistance=100mR, Supplier Part Number 1=311-0.1TCT-ND, Temperature Coefficient=600ppm/°C, Tolerance=5%, Voltage Rating=500V, Case/Package=2512, Category="Chip SMD Resistors", ComponentLink1Description=https://datasheet.ciiva.com/22698/1747499-22698992.pdf?src-supplier=Element14, ComponentLink1URL=https://datasheet.ciiva.com/22698/1747499-22698992.pdf?src-supplier=Element14, ComponentLink2Description=https://datasheet.ciiva.com/5558/pyu-rl-521-rohs-l-5-5558076.pdf?src-supplier=Mouser, ComponentLink2URL=https://datasheet.ciiva.com/5558/pyu-rl-521-rohs-l-5-5558076.pdf?src-supplier=Mouser, Composition="Thick Film", Contact Plating=Tin,Lead, Features="Moisture Resistant", Height=0.026inch, Lead Free="Lead Free", Length=0.25inch, Number of Terminations=2, Packaging="Tape and Reel", Power Rating=1W, Pricing 1="1=0.54000, 10=0.38200, 100=0.19890, 1000=0.10709 (USD)", REACH SVHC=Unknown, RoHS=Yes, Stock 1=28825, Supplier 1=Digi-Key, Termination=SMD/SMT, Width=0.126inch
R2 R7 R11: library part CMP-2100-03669-1, "Chip Resistor, 100 Ohm, +/-1%, 0.125 W, -55 to 155 degC, 0805 (2012 Metric), RoHS, Tape and Reel", Case Code (Imperial)=0805, Case Code (Metric)=2012, Manufacturer=Yageo, Manufacturer Part Number=RC0805FR-07100RL, Max Operating Temperature=155degC, Max Power Dissipation=125mW, Min Operating Temperature=-55degC, Package Description="2-Pin Surface Mounted Device, Body 2 x 1.25 mm", Package Quantity=1, Resistance=100Ohm, Supplier Part Number 1=311-100CRCT-ND, Temperature Coefficient=100ppm/degreesC, Tolerance=1%, Voltage Rating=150V, Case/Package=0805, Category="Chip SMD Resistors", ComponentLink10Description=https://datasheet.ciiva.com/22747/444164-22747535.pdf?src-supplier=Element14, ComponentLink10URL=https://datasheet.ciiva.com/22747/444164-22747535.pdf?src-supplier=Element14, ComponentLink1Description=https://datasheet.ciiva.com/7941/1697719-7941680.pdf?src-supplier=Element14, ComponentLink1URL=https://datasheet.ciiva.com/7941/1697719-7941680.pdf?src-supplier=Element14, ComponentLink2Description=https://datasheet.ciiva.com/11808/0900766b8106beab-11808877.pdf?src-supplier=RSComponents, ComponentLink2URL=https://datasheet.ciiva.com/11808/0900766b8106beab-11808877.pdf?src-supplier=RSComponents, ComponentLink3Description=https://datasheet.ciiva.com/17082/rc0805-17082697.pdf?src-supplier=Future+Electronics, ComponentLink3URL=https://datasheet.ciiva.com/17082/rc0805-17082697.pdf?src-supplier=Future+Electronics, ComponentLink4Description=https://datasheet.ciiva.com/46447/444164-46447562.pdf?src-supplier=Element14, ComponentLink4URL=https://datasheet.ciiva.com/46447/444164-46447562.pdf?src-supplier=Element14, ComponentLink5Description=https://datasheet.ciiva.com/2456/pyu-r-int-thick-7-2456987.pdf?src-supplier=Digi-Key, ComponentLink5URL=https://datasheet.ciiva.com/2456/pyu-r-int-thick-7-2456987.pdf?src-supplier=Digi-Key, ComponentLink6Description=https://datasheet.ciiva.com/2456/pyu-r-int-thick-7-2456988.pdf?src-supplier=Digi-Key, ComponentLink6URL=https://datasheet.ciiva.com/2456/pyu-r-int-thick-7-2456988.pdf?src-supplier=Digi-Key, ComponentLink7Description=https://datasheet.ciiva.com/2456/pyu-r-int-thick-7-2456989.pdf?src-supplier=Digi-Key, ComponentLink7URL=https://datasheet.ciiva.com/2456/pyu-r-int-thick-7-2456989.pdf?src-supplier=Digi-Key, ComponentLink8Description=https://datasheet.ciiva.com/7660/38627-7660797.pdf?src-supplier=Element14, ComponentLink8URL=https://datasheet.ciiva.com/7660/38627-7660797.pdf?src-supplier=Element14, ComponentLink9Description=https://datasheet.ciiva.com/7941/1686128-7941679.pdf?src-supplier=Element14, ComponentLink9URL=https://datasheet.ciiva.com/7941/1686128-7941679.pdf?src-supplier=Element14, Composition=ThickFilm, Datasheet URL=http://www.yageo.com/NewPortal/yageodocoutput?fileName=/pdf/R-Chip/PYu-RC_Group_51_RoHS_L_5.pdf, Datasheet Version="Rev. 5, 10/2016", Depth=1.25mm, Features="Moisture Resistant", Height=0.024inch, Lead Free=LeadFree, Lead Pitch=0.4mm, Length=2mm, Manufacturer URL=http://www.yageo.com/, Military Standard=Not, Number of Pins=2, Number of Terminations=2, Package Reference=0805, Packaging=TapeandReel, Power Rating=125mW, Pricing 1="1=0.10000, 10=0.04000, 100=0.01630, 1000=0.00731, 2500=0.00635 (USD)", REACH SVHC=Unknown, RoHS=Yes, RoHSCompliant=true, Stock 1=7597433, Supplier 1=Digi-Key, Termination=SMD/SMT, Voltage Rating (DC)=150V, Width=0.049inch
R3 R6 R10: library part CMP-2001-00364-1, Case Code (Imperial)=0805, Case Code (Metric)=2012, Manufacturer=Panasonic, Manufacturer Part Number=ERA-6AED183V, Max Operating Temperature=155°C, Min Operating Temperature=-55°C, Package Quantity=5000, Power Rating=125mW, Resistance=18kR, Supplier Part Number 1=P123817CT-ND, Temperature Coefficient=25ppm/°C, Tolerance=0.5%, Voltage Rating=100V, Case/Package=0805, Category="Chip SMD Resistors", ComponentLink1Description=https://datasheet.ciiva.com/9192/aoa0000ce26-9192506.pdf?src-supplier=Avnet, ComponentLink1URL=https://datasheet.ciiva.com/9192/aoa0000ce26-9192506.pdf?src-supplier=Avnet, Composition="Thin Film", Contact Plating=Tin, Depth=1.25mm, Height=0.5mm, Lead Free="Lead Free", Length=2mm, Military Standard=Not, Mount="Surface Mount", Packaging="Tape and Reel", Pricing 1="1=0.11000, 10=0.10300, 25=0.07120, 50=0.05540, 100=0.03960, 250=0.03088, 500=0.02456, 1000=0.01742 (USD)", RoHS=Yes, Stock 1=15192, Supplier 1=Digi-Key, Width=1.25mm
R4 R8 R12: library part CMP-2001-00364-1, Case Code (Imperial)=0805, Case Code (Metric)=2012, Manufacturer=Yageo, Manufacturer Part Number=RC0805FR-071ML, Max Operating Temperature=155°C, Max Power Dissipation=125mW, Min Operating Temperature=-55°C, Package Quantity=1, Resistance=1MR, Supplier Part Number 1=311-1.00MCRCT-ND, Temperature Coefficient=100ppm/°C, Tolerance=1%, Voltage Rating=150V, Case/Package=0805, Category="Chip SMD Resistors", ComponentLink1Description=https://datasheet.ciiva.com/2519/pyu-r-int-thick-7-2519713.pdf?src-supplier=Digi-Key, ComponentLink1URL=https://datasheet.ciiva.com/2519/pyu-r-int-thick-7-2519713.pdf?src-supplier=Digi-Key, ComponentLink2Description=https://datasheet.ciiva.com/12666/rc0805-12666975.pdf?src-supplier=Mouser, ComponentLink2URL=https://datasheet.ciiva.com/12666/rc0805-12666975.pdf?src-supplier=Mouser, ComponentLink3Description=https://datasheet.ciiva.com/2519/pyu-r-int-thick-7-2519712.pdf?src-supplier=Digi-Key, ComponentLink3URL=https://datasheet.ciiva.com/2519/pyu-r-int-thick-7-2519712.pdf?src-supplier=Digi-Key, ComponentLink4Description=https://datasheet.ciiva.com/17419/rc0805-17419909.pdf?src-supplier=Future+Electronics, ComponentLink4URL=https://datasheet.ciiva.com/17419/rc0805-17419909.pdf?src-supplier=Future+Electronics, ComponentLink5Description=https://datasheet.ciiva.com/2519/pyu-r-int-thick-7-2519711.pdf?src-supplier=Digi-Key, ComponentLink5URL=https://datasheet.ciiva.com/2519/pyu-r-int-thick-7-2519711.pdf?src-supplier=Digi-Key, Composition="Thick Film", Depth=1.25mm, Features="Moisture Resistant", Height=0.024inch, Lead Free="Lead Free", Length=0.079inch, Military Standard=Not, Number of Terminations=2, Packaging="Tape and Reel", Power Rating=125mW, Pricing 1="1=0.100000, 10=0.040000, 100=0.016300, 1000=0.007310, 2500=0.006350 (USD)", REACH SVHC=Unknown, RoHS=Yes, Stock 1=5090865, Supplier 1=Digi-Key, Termination=SMD/SMT, Width=0.049inch
R13 R15 R16: library part CMP-2000-06960-1, "Chip Resistor, 300 Ohm, +/- 1%, 125 mW, -55 to 155 degC, 0805 (2012 Metric), RoHS, Tape and Reel", Case Code - in=0805, Case Code - mm=2012, Manufacturer=Yageo, Manufacturer Part Number=RC0805FR-07300RL, Max Operating Temperature=155°C, Min Operating Temperature=-55°C, Operating Temperature Range=-55Cto+155C, Package Description="2-Pin Surface Mounted Device, Body 2 x 1.25 mm", Power Rating=125mW(1/8W), Supplier Part Number 1=311-300CRCT-ND, Temperature Coefficient=100PPM/C, Tolerance=1%, Voltage Rating=150V, Case Code (Imperial)=0805, Case Code (Metric)=2012, Case/Package=0805, Category="Chip SMD Resistors", ComponentLink1Description=https://datasheet.ciiva.com/11819/0900766b8106beab-11819824.pdf?src-supplier=RSComponents, ComponentLink1URL=https://datasheet.ciiva.com/11819/0900766b8106beab-11819824.pdf?src-supplier=RSComponents, ComponentLink2Description=https://datasheet.ciiva.com/5558/rc0805-5558042.pdf?src-supplier=Mouser, ComponentLink2URL=https://datasheet.ciiva.com/5558/rc0805-5558042.pdf?src-supplier=Mouser, ComponentLink3Description=https://datasheet.ciiva.com/15189/getdatasheetpartid-328116-15189946.pdf?src-supplier=Verical, ComponentLink3URL=https://datasheet.ciiva.com/15189/getdatasheetpartid-328116-15189946.pdf?src-supplier=Verical, Composition="Thick Film", Datasheet URL=http://www.yageo.com/documents/recent/PYu-RC_Group_51_RoHS_L_7.pdf, Datasheet Version="Rev. 7, 05/2017", Depth=1.25mm, Height=0.5mm, Lead Free="Lead Free", Length=2mm, Manufacturer URL=http://www.yageo.com/, Military Standard=Not, Mount="Surface Mount", Mounting Technology=SurfaceMount, Number of Terminations=2, Package Reference=0805, Packaging=Reel, Pricing 1="1=0.10000, 10=0.04000, 100=0.01630, 1000=0.00731, 2500=0.00635 (USD)", Product=ThickFilmResistorsGeneralPurpose, Resistance=300R, RoHS=Yes, Series=RC, Stock 1=1132617, Supplier 1=Digi-Key, Termination=SMD/SMT, Termination Style=SMD/SMT, Voltage Rating (DC)=150V, Working Voltage=150V
R14: library part CMP-2000-06960-1, "Chip Resistor, 270 Ohm, +/- 1%, 125 mW, -55 to 155 degC, 0805 (2012 Metric), RoHS, Tape and Reel", Case Code (Imperial)=0805, Case Code (Metric)=2012, Manufacturer=Yageo, Manufacturer Part Number=RC0805FR-07270RL, Max Operating Temperature=155°C, Max Power Dissipation=125mW, Min Operating Temperature=-55°C, Package Quantity=1, Supplier Part Number 1=311-270CRCT-ND, Temperature Coefficient=100ppm/°C, Tolerance=1%, Voltage Rating=150V, Case/Package=0805, Category="Chip SMD Resistors", ComponentLink1Description=https://datasheet.ciiva.com/11819/0900766b8106beab-11819832.pdf?src-supplier=RSComponents, ComponentLink1URL=https://datasheet.ciiva.com/11819/0900766b8106beab-11819832.pdf?src-supplier=RSComponents, ComponentLink2Description=https://datasheet.ciiva.com/2457/pyu-r-int-thick-7-2457203.pdf?src-supplier=Digi-Key, ComponentLink2URL=https://datasheet.ciiva.com/2457/pyu-r-int-thick-7-2457203.pdf?src-supplier=Digi-Key, ComponentLink3Description=https://datasheet.ciiva.com/2457/pyu-r-int-thick-7-2457204.pdf?src-supplier=Digi-Key, ComponentLink3URL=https://datasheet.ciiva.com/2457/pyu-r-int-thick-7-2457204.pdf?src-supplier=Digi-Key, ComponentLink4Description=https://datasheet.ciiva.com/2457/pyu-r-int-thick-7-2457205.pdf?src-supplier=Digi-Key, ComponentLink4URL=https://datasheet.ciiva.com/2457/pyu-r-int-thick-7-2457205.pdf?src-supplier=Digi-Key, ComponentLink5Description=https://datasheet.ciiva.com/7941/444164-7941749.pdf?src-supplier=Element14, ComponentLink5URL=https://datasheet.ciiva.com/7941/444164-7941749.pdf?src-supplier=Element14, ComponentLink6Description=https://datasheet.ciiva.com/17419/rc0805-17419894.pdf?src-supplier=Future+Electronics, ComponentLink6URL=https://datasheet.ciiva.com/17419/rc0805-17419894.pdf?src-supplier=Future+Electronics, ComponentLink7Description=https://datasheet.ciiva.com/12577/rc0805-12577399.pdf?src-supplier=Mouser, ComponentLink7URL=https://datasheet.ciiva.com/12577/rc0805-12577399.pdf?src-supplier=Mouser, ComponentLink8Description=https://datasheet.ciiva.com/7660/38627-7660799.pdf?src-supplier=Element14, ComponentLink8URL=https://datasheet.ciiva.com/7660/38627-7660799.pdf?src-supplier=Element14, Composition="Thick Film", Depth=1.25mm, Features="Moisture Resistant", Height=0.5mm, Lead Free="Lead Free", Lead Pitch=0.4mm, Length=2mm, Military Standard=Not, Number of Pins=2, Number of Terminations=2, Packaging="Tape and Reel", Power Rating=125mW, Pricing 1="1=0.10000, 10=0.04000, 100=0.01630, 1000=0.00731, 2500=0.00635 (USD)", REACH SVHC=Unknown, Resistance=270R, RoHS=Yes, Stock 1=297425, Supplier 1=Digi-Key, Termination=SMD/SMT, Voltage Rating (DC)=150V, Weight=0.000194oz, Width=1.25mm
R17 R18: library part CMP-2100-03672-1, "Chip Resistor, 3.3 KOhm, +/- 1%, 0.125 W, -55 to 155 degC, 0805 (2012 Metric), RoHS, Tape and Reel", Case Code (Imperial)=0805, Case Code (Metric)=2012, Manufacturer=Yageo, Manufacturer Part Number=RC0805FR-073K3L, Max Operating Temperature=155degC, Max Power Dissipation=125mW, Min Operating Temperature=-55degC, Package Description="2-Pin Surface Mounted Device, Body 2 x 1.25 mm", Package Quantity=1, Resistance=3.3KOhm, Supplier Part Number 1=311-3.30KCRCT-ND, Temperature Coefficient=100ppm/degreesC, Tolerance=1%, Voltage Rating=150V, Case/Package=0805, Category="Chip SMD Resistors", ComponentLink1Description=https://datasheet.ciiva.com/7941/444164-7941782.pdf?src-supplier=Element14, ComponentLink1URL=https://datasheet.ciiva.com/7941/444164-7941782.pdf?src-supplier=Element14, ComponentLink2Description=https://datasheet.ciiva.com/7941/444164-7941783.pdf?src-supplier=Element14, ComponentLink2URL=https://datasheet.ciiva.com/7941/444164-7941783.pdf?src-supplier=Element14, ComponentLink3Description=https://datasheet.ciiva.com/2457/pyu-r-int-thick-7-2457992.pdf?src-supplier=Digi-Key, ComponentLink3URL=https://datasheet.ciiva.com/2457/pyu-r-int-thick-7-2457992.pdf?src-supplier=Digi-Key, ComponentLink4Description=https://datasheet.ciiva.com/2457/pyu-r-int-thick-7-2457993.pdf?src-supplier=Digi-Key, ComponentLink4URL=https://datasheet.ciiva.com/2457/pyu-r-int-thick-7-2457993.pdf?src-supplier=Digi-Key, ComponentLink5Description=https://datasheet.ciiva.com/2457/pyu-r-int-thick-7-2457994.pdf?src-supplier=Digi-Key, ComponentLink5URL=https://datasheet.ciiva.com/2457/pyu-r-int-thick-7-2457994.pdf?src-supplier=Digi-Key, ComponentLink6Description=https://datasheet.ciiva.com/16747/rc0805-16747115.pdf?src-supplier=Future+Electronics, ComponentLink6URL=https://datasheet.ciiva.com/16747/rc0805-16747115.pdf?src-supplier=Future+Electronics, ComponentLink7Description=https://datasheet.ciiva.com/46447/444164-46447579.pdf?src-supplier=Element14, ComponentLink7URL=https://datasheet.ciiva.com/46447/444164-46447579.pdf?src-supplier=Element14, ComponentLink8Description=https://datasheet.ciiva.com/12577/rc0805-12577341.pdf?src-supplier=Mouser, ComponentLink8URL=https://datasheet.ciiva.com/12577/rc0805-12577341.pdf?src-supplier=Mouser, Composition=ThickFilm, Datasheet URL=http://www.yageo.com/NewPortal/yageodocoutput?fileName=/pdf/R-Chip/PYu-RC_Group_51_RoHS_L_5.pdf, Datasheet Version="Rev. 5, 10/2016", Depth=1.25mm, Features="Moisture Resistant", Height=0.5mm, Lead Free=LeadFree, Length=2mm, Manufacturer URL=http://www.yageo.com/, Number of Terminations=2, Package Reference=0805, Packaging=TapeandReel, Power Rating=125mW, Pricing 1="1=0.10000, 10=0.04000, 100=0.01630, 1000=0.00731, 2500=0.00635 (USD)", REACH SVHC=NoSVHC, RoHS=Yes, RoHSCompliant=true, Stock 1=608723, Supplier 1=Digi-Key, Termination=SMD/SMT, Weight=0.000194oz, Width=0.049inch